# Altium PCB PCB_2.PcbDoc (part 2 of 2)
Units mm, origin at the board's own origin, x right, y up, seen from the top; angles counter-clockwise.
Board outline 100.25 x 100.26 mm, 2 copper layers (Top Layer, Bottom Layer); 108 components, 0 nets, 441 pads, 91 vias.
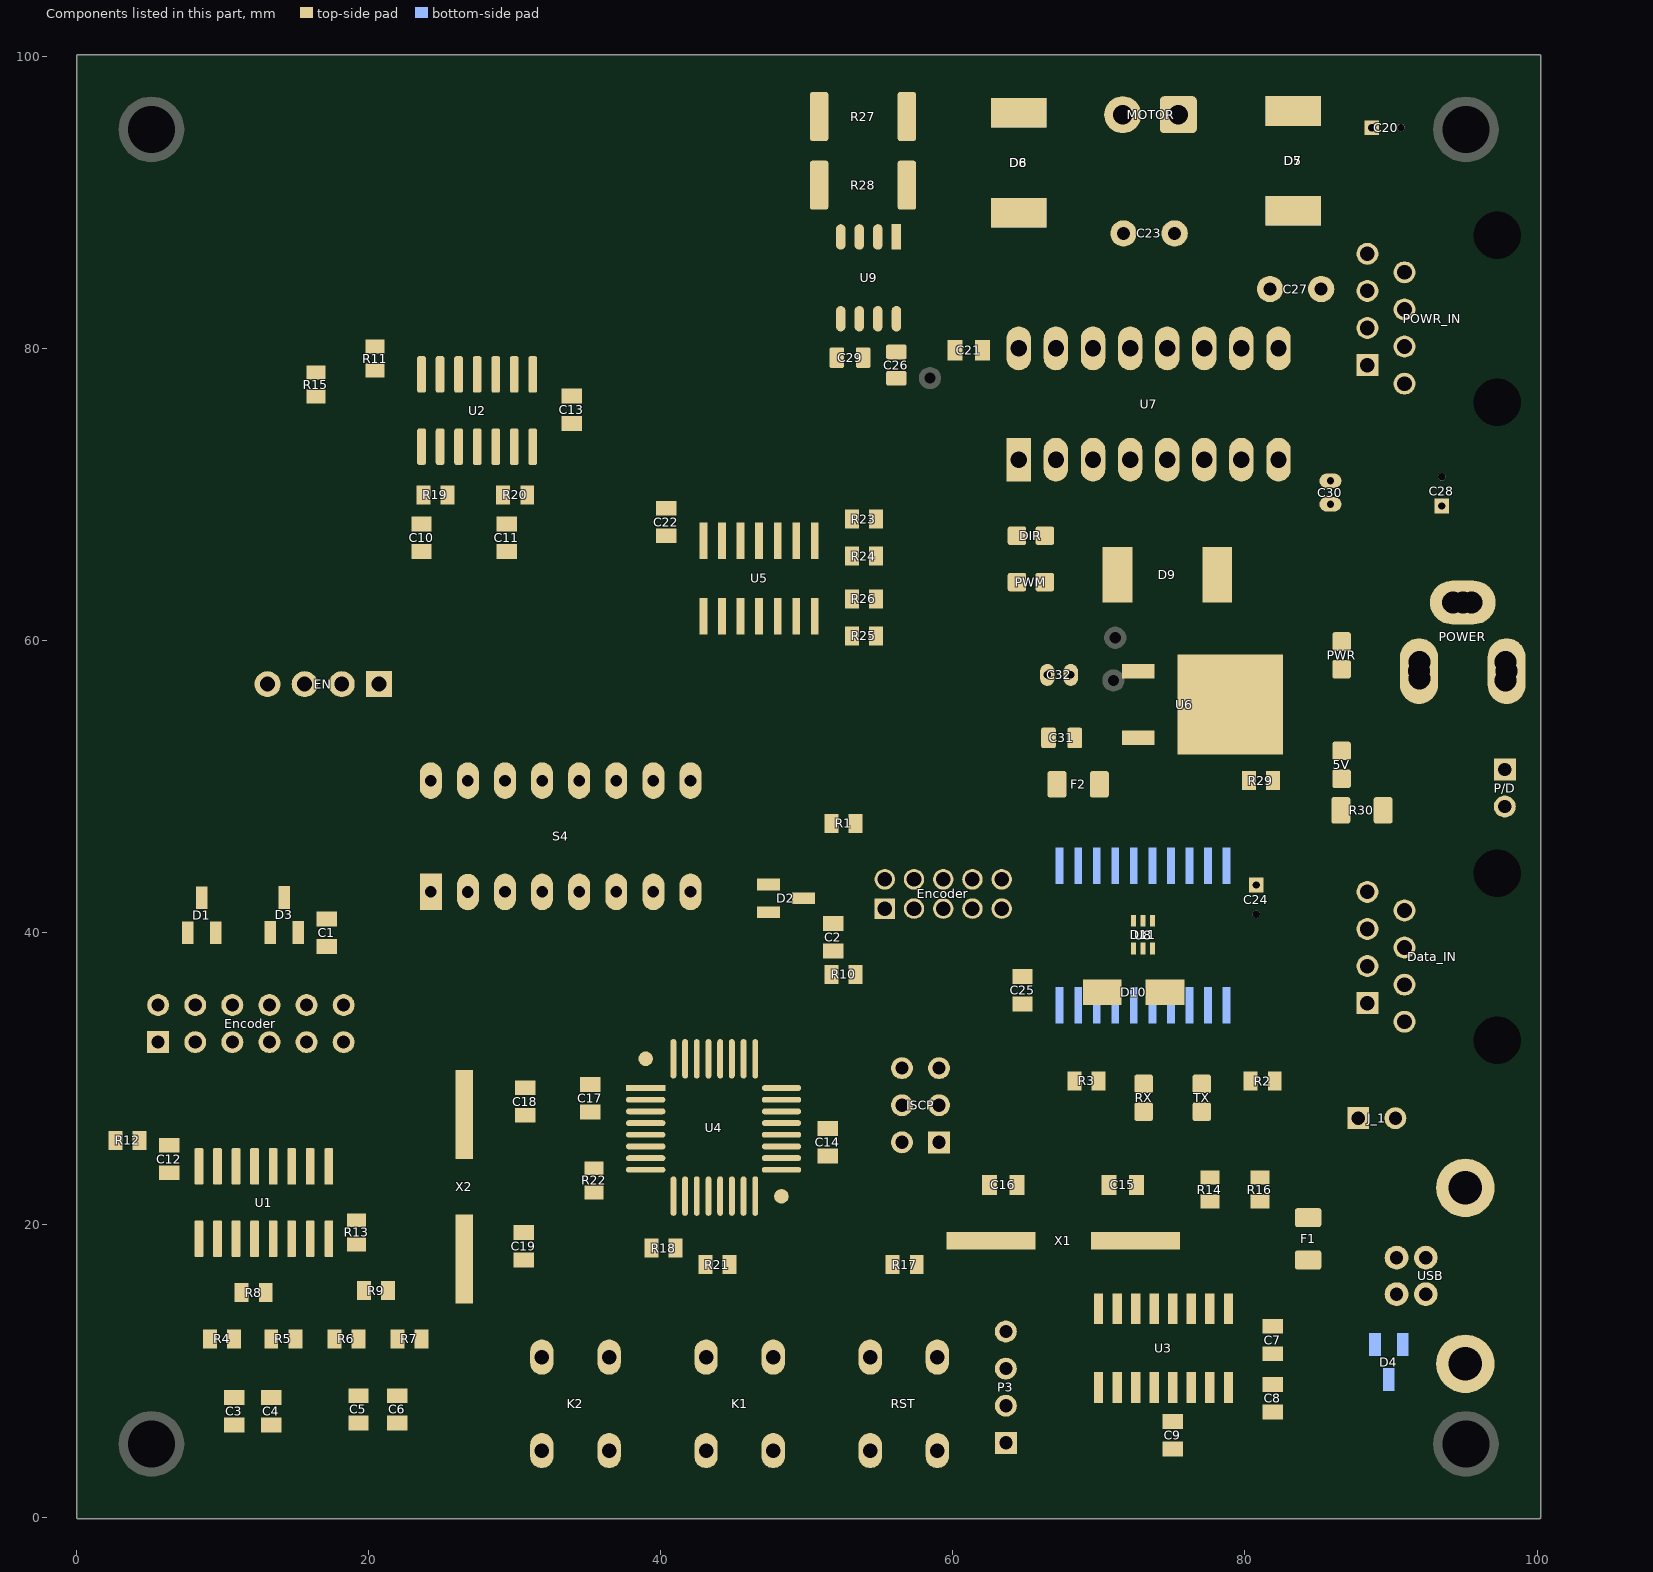
[diagram p2: the components of this part, seen from the top]

## Via types
v1: diameter 1.27, hole 0.711, Top Layer to Bottom Layer, 91 vias

## Nets (pads, with @x,y where several pads share a name; then routed paths per layer and width w, separated by ;. In a path a pad name is that pad's centre, name@x,y a point inside that pad or via, vN(x,y) a via of type N, cw(c..) or ccw(c..) an arc to the next point about the centre after c; other vN are vias at no path point) (continued)
copper on no net: | length 3549.7
  Top Layer w0.2: 72.3,40.64 72.375,40.715 72.375,40.828 ; 72.95,41.323 72.95,40.903 73,40.853 73.025,40.828 72.957,40.76 ; 86.36,36.449 90.922,36.449
  Top Layer w0.3: v1@68.58,38.748 68.766,38.933 68.766,39.356 70.984,41.575 ; v1(70.957,40.155) 71.143,40.341 72.001,40.341 72.3,40.64 ; 70.987,41.578 70.984,41.575 ; v1(72.375,33.293) 72.375,38.928 72.4,38.953 72.4,39.373 72.705,39.678 77.461,39.678 77.515,39.624 85.725,39.624 86.36,40.259 88.382,40.259 ; 72.544,42.591 72.59,42.545 73.65,41.485 73.65,40.853 73.675,40.828 ; 73,40.853 73,41.273 72.95,41.323 72.695,41.578 71.841,41.578 71.838,41.575 70.984,41.575 ; 73.025,38.928 73.025,37.973 73.406,37.592 74.549,37.592 74.714,37.757 75.291,37.757 v1(75.438,37.904) ; v1@75.438,37.943 79.798,37.943 80.283,38.428 84.381,38.428 86.36,36.449
  Top Layer w0.4: 2.667,25.781 2.667,25.606 3.44,24.833 3.44,22.297 3.674,22.063 12.475,22.063 13.462,23.05 13.462,24 ; v1(3.429,20.193) 3.683,20.193 4.953,21.463 20.447,21.463 21.717,20.193 ; v1(4.475,23.495) 4.513,23.533 6.312,23.533 6.35,23.571 ; 6.35,25.928 6.584,26.162 8.001,26.162 8.382,25.781 8.382,24 8.382,23.05 ; v1(7.62,16.002) 9.398,16.002 9.7,15.7 11.028,15.7 11.303,15.425 11.303,15.192 10.794,14.683 10.794,12.192 10.794,8.18 10.795,8.179 ; v1(9.633,28.956) 9.643,28.947 9.643,24.009 9.652,24 ; 10.795,6.299 13.335,6.299 13.399,6.363 19.241,6.363 19.304,6.426 21.971,6.426 ; 10.922,24 v1(10.922,26.924) ; 12.192,19.05 12.292,19.15 12.292,20.235 12.92,20.863 17.814,20.863 18.083,20.594 18.902,20.594 19.177,20.319 ; 12.192,24 12.192,24.95 15.436,28.194 17.053,28.194 20.193,31.334 20.193,45.72 22.479,48.006 27.424,48.006 29.337,49.919 29.337,50.419 ; 12.953,15.367 12.953,15.192 13.228,14.917 ; 13.335,8.179 13.336,8.18 13.336,12.192 13.336,14.809 13.228,14.917 ; v1(14.605,14.859) 14.547,14.917 13.228,14.917 ; 14.732,24 14.832,23.9 14.832,22.584 15.066,22.35 19.937,22.35 21.082,23.495 21.082,44.196 23.622,46.736 28.694,46.736 31.615,49.657 31.877,49.657 31.877,50.419 ; 14.986,12.192 14.986,12.367 16.002,13.383 v1(16.002,16.383) ; 15.621,57.023 15.621,69.469 20.193,74.041 20.193,74.295 15.494,74.295 14.263,75.526 14.263,78.779 15.62,80.136 20.447,80.136 ; 16.002,24 v1(16.002,26.543) ; 16.383,76.708 21.143,76.708 23.622,74.229 23.622,73.279 23.685,73.215 23.685,70.04 23.749,69.977 23.749,68.123 23.622,67.996 21.641,67.996 18.161,64.516 18.161,57.023 ; 17.272,19.05 17.272,18.769 17.372,18.669 19.177,18.669 20.193,18.669 21.717,20.193 ; 17.272,24 17.272,24.875 17.372,24.975 18.498,24.975 v1(18.923,25.4) ; 17.654,12.192 17.654,13.336 v1(18.034,13.716) ; v1(18.923,17.272) 18.923,17.037 19.411,16.549 19.411,15.594 19.686,15.319 19.304,14.937 19.304,12.192 19.304,8.306 ; 20.701,57.023 23.622,59.944 23.622,66.116 29.464,66.116 31.064,66.116 ; v1(21.399,18.098) 21.399,15.382 21.336,15.319 21.972,14.683 21.972,12.192 21.972,8.307 21.971,8.306 ; v1(22.479,32.131) 22.098,31.75 22.098,24.575 24.384,22.289 24.384,18.796 ; v1(22.987,16.129) 23.622,15.494 23.622,12.192 ; 23.622,78.229 23.622,78.386 23.622,81.026 24.638,82.042 32.004,82.042 33.909,80.137 33.909,76.759 37.033,76.759 40.386,73.406 40.386,69.063 41.885,69.063 v1(43.307,70.485) ; 24.257,50.419 24.257,53.467 25.019,54.229 v1(25.019,62.103) ; 24.892,73.279 24.892,70.659 25.399,70.152 25.399,69.977 v1(25.399,67.819) ; v1(25.273,75.565) 26.062,74.776 26.062,73.379 26.162,73.279 26.162,71.188 27.373,69.977 29.21,69.977 29.21,68.25 29.173,68.287 27.598,68.287 v1(27.432,68.453) ; 26.543,17.653 26.594,17.602 30.607,17.602 32.024,17.602 32.258,17.837 32.258,19.625 33.421,20.787 33.82,20.787 35.258,22.225 35.433,22.225 35.708,22.5 36.548,22.5 37.819,23.771 38.969,23.771 ; 26.543,27.559 26.594,27.508 30.734,27.508 30.924,27.508 32.8,25.633 32.8,25.442 34.367,23.875 35.433,23.875 35.608,23.875 36.304,24.571 38.969,24.571 ; v1(26.67,63.754) 26.797,63.627 26.797,50.419 ; 27.432,73.279 27.432,71.608 27.793,71.247 30.607,71.247 30.86,70.994 30.86,69.977 31.031,69.806 31.031,68.493 v1(31.197,68.327) ; v1(28.575,63.881) 38.227,63.881 47.371,54.737 47.371,43.307 47.751,43.307 48.351,43.907 51.646,43.907 52.246,43.307 v1(52.749,43.307) ; v1(28.956,60.833) 39.818,60.833 45.72,54.931 45.72,41.641 45.954,41.407 47.371,41.407 47.371,40.621 47.733,40.259 v1(49.149,40.259) ; 29.337,42.799 29.337,42.565 39.581,32.321 40.869,32.321 40.869,36.578 40.556,36.891 v1(40.556,37.127) ; v1(30.607,21.971) 30.607,19.482 29.211,19.482 26.95,21.742 26.899,21.742 24.638,24.003 24.638,31.115 25.146,31.623 28.308,31.623 30.543,29.388 30.734,29.388 32.08,29.388 33.731,27.737 35.179,27.737 35.23,27.686 37.403,27.686 37.488,27.771 37.819,27.771 38.969,27.771 41.063,27.771 41.411,27.423 ; 31.877,42.799 31.877,42.299 31.475,41.897 30.687,42.684 30.687,43.858 29.896,44.649 28.778,44.649 27.987,43.858 27.987,41.609 37.277,32.319 37.277,30.795 38.135,29.937 38.135,29.371 38.969,29.371 ; v1(34.036,32.893) 34.036,30.618 35.037,29.616 35.179,29.616 ; 34.417,50.419 34.417,49.919 30.599,46.101 24.511,46.101 22.352,43.942 22.352,37.338 23.368,36.322 32.071,36.322 36.477,31.915 36.477,29.464 37.37,28.571 38.969,28.571 ; v1(36.601,75.057) 36.424,74.879 33.909,74.879 31.892,74.879 31.242,74.229 31.242,73.279 31.242,72.329 32.432,71.139 32.432,67.484 31.064,66.116 ; v1(38.1,59.055) 38.1,53.086 38.107,53.079 38.107,49.683 39.497,48.293 39.497,42.799 ; 38.969,25.371 36.732,25.371 v1(35.814,26.289) 36.496,26.971 38.969,26.971 ; 38.969,26.171 41.177,26.171 41.411,26.405 41.411,27.423 ; 39.37,18.415 37.338,18.415 v1(35.814,19.939) 35.722,19.847 35.722,18.704 30.226,13.208 27.305,13.208 25.146,13.208 24.384,13.97 24.384,18.796 ; v1(40.132,58.42) 40.132,58.185 40.748,57.569 40.748,44.588 42.037,43.299 42.037,42.799 ; 41.02,18.415 41.02,18.59 41.669,19.239 41.669,21.971 ; v1(41.148,79.629) 51.805,79.629 52.059,79.375 ; 41.669,31.371 41.669,34.437 42.153,34.921 61.218,34.921 68.389,27.749 73.063,27.749 ; v1(41.783,57.404) 41.783,56.515 43.706,54.592 43.706,38.372 42.799,37.465 v1(42.799,36.068) ; 42.469,21.971 42.469,19.174 43.053,18.59 43.053,17.272 ; 42.469,31.371 42.469,33.837 42.953,34.321 60.548,34.321 68.453,26.416 v1(70.485,26.416) ; v1(42.896,29.18) 42.896,28.986 43.707,28.175 45.563,28.175 45.959,28.571 48.269,28.571 ; 42.926,61.671 42.926,60.688 45.194,58.42 v1(45.847,58.42) ; 42.926,66.853 42.926,65.131 42.692,64.897 41.656,64.897 40.386,66.167 40.386,67.183 40.195,67.183 39.129,66.116 31.064,66.116 ; 43.269,31.371 43.269,33.237 43.753,33.721 58.821,33.721 59.055,33.487 59.055,30.734 ; 44.069,31.371 44.069,32.521 44.269,32.721 44.269,32.77 44.62,33.121 46.718,33.121 50.248,29.591 v1(51.435,29.591) ; 44.196,61.671 44.196,66.853 ; v1(44.577,26.035) 44.713,26.171 48.269,26.171 ; 44.703,17.272 47.516,14.459 50.467,14.459 51.435,15.427 51.435,24.714 ; v1(44.831,29.21) 44.869,29.248 44.869,31.371 ; v1(45.339,82.169) 45.466,82.296 49.149,82.296 50.419,83.566 54.61,83.566 54.864,83.312 54.864,82.042 ; 45.669,21.971 45.869,21.771 45.869,20.572 48.514,17.927 v1(48.514,17.145) ; v1(45.72,72.39) 45.72,72.155 45.466,71.901 45.466,66.853 45.466,64.897 45.847,64.516 47.879,64.516 48.006,64.643 48.006,66.853 ; 46.469,21.971 46.469,20.821 50.038,17.252 v1(50.038,15.494) ; 46.736,66.853 46.736,69.79 49.336,72.39 54.382,72.39 56.541,70.231 65.559,70.231 67.056,71.728 67.056,72.39 ; 48.269,23.771 49.419,23.771 49.911,23.279 v1(49.911,20.828) ; 48.269,24.571 49.993,24.571 50.137,24.714 51.435,24.714 ; 49.276,66.853 v1(49.276,70.866) ; v1(49.53,64.516) 49.53,64.687 50.629,65.786 ; v1@49.943,45.751 49.943,58.325 ; 51.689,38.633 51.816,38.76 ; v1(52.324,70.755) 52.324,70.532 53.086,69.77 53.086,68.326 53.086,68.501 53.961,69.376 55.377,69.376 56.427,68.326 65.151,68.326 66.294,67.183 ; 52.324,82.042 52.276,81.994 52.276,80.851 52.07,80.645 52.07,79.386 52.059,79.375 ; 52.324,87.642 53.594,87.642 ; 53.086,65.786 50.629,65.786 ; v1@53.562,24.225 52.578,23.241 52.578,17.907 53.213,17.272 55.88,17.272 ; 53.594,82.042 53.642,81.994 53.642,80.851 53.975,80.518 53.975,79.491 53.859,79.375 ; 54.736,60.325 54.863,60.198 60.579,60.198 64.389,64.008 ; 54.736,62.865 60.071,62.865 64.389,67.183 ; 56.134,77.967 52.293,77.967 52.059,78.201 52.059,79.375 ; 56.134,79.767 56.134,82.03 ; 56.134,82.042 56.134,82.03 ; 56.515,25.654 54.991,25.654 54.038,24.701 54.026,24.714 51.435,24.714 ; 56.515,30.734 52.499,26.718 51.559,26.718 51.435,26.594 51.244,26.594 50.867,26.971 48.269,26.971 45.388,26.971 44.936,27.423 41.411,27.423 ; 57.279,43.718 57.341,43.656 ; v1(58.674,37.297) 58.814,37.297 59.617,38.1 61.595,38.1 68.164,44.669 73.727,44.669 74.041,44.983 v1(74.041,47.371) ; 58.674,81.788 58.547,81.915 56.249,81.915 56.134,82.03 ; 58.942,10.947 58.942,9.003 61.341,6.604 61.341,3.704 61.616,3.429 73.647,3.429 74.867,4.648 75.057,4.648 ; 62.509,19.025 62.509,17.379 62.744,17.145 64.598,17.145 67.491,14.252 69.977,14.252 ; 63.627,5.08 71.247,5.08 72.399,6.232 72.399,8.745 72.517,8.862 ; 63.627,7.62 63.417,7.83 62.401,7.83 61.849,8.382 61.849,13.843 62.103,14.097 64.262,14.097 66.929,11.43 73.152,11.43 73.787,10.795 73.787,8.862 ; 63.627,10.16 67.31,6.477 70.485,6.477 71.22,7.212 71.22,8.835 71.247,8.862 ; 63.627,12.7 67.465,8.862 69.977,8.862 ; v1(64.135,50.292) 66.929,47.498 v1(69.342,47.498) ; 64.77,35.128 64.96,35.128 64.968,35.136 68.58,38.748 v1(68.58,38.862) ; 66.294,64.008 66.294,65.243 67.652,66.601 67.652,67.567 66.132,69.088 56.836,69.088 54.134,71.79 50.78,71.79 50.546,71.556 50.546,66.853 50.546,65.869 50.629,65.786 ; v1@66.421,38.468 v1(66.421,38.481) 66.421,41.021 69.469,44.069 77.978,44.069 80.772,41.275 83.246,41.275 87.978,46.007 ; v1(67.691,24.638) 66.294,24.638 64.888,23.232 64.697,23.232 64.389,22.924 64.389,22.733 70.688,22.733 ; v1(69.85,42.591) 72.544,42.591 ; 69.976,29.855 70.177,29.654 73.063,29.654 ; 70.03,50.165 70.538,50.673 v1(72.517,50.673) ; 71.247,14.252 71.247,15.748 70.758,16.237 70.758,18.523 71.158,18.923 72.517,18.923 ; v1(71.993,16.748) 71.993,16.526 72.517,16.002 72.517,14.252 ; 72.59,42.545 73.787,42.545 75.946,40.386 83.206,40.386 85.619,42.799 88.382,42.799 ; 73.787,14.252 v1(73.787,15.875) ; 75.057,6.528 75.057,8.862 75.082,8.837 ; 75.057,14.252 75.057,12.319 75.819,11.557 80.226,11.557 81.724,13.056 81.915,13.056 ; 76.327,14.252 76.327,18.161 77.597,19.431 77.597,21.591 ; 77.042,29.654 80.2,29.654 80.391,29.845 ; 77.597,14.252 77.597,16.383 81.026,19.812 81.026,21.591 ; 78.359,54.991 78.994,55.626 ; 78.867,8.13 78.985,8.012 79.789,8.012 80.612,7.188 81.915,7.188 ; 78.867,14.252 78.867,15.514 79.101,15.748 82.296,15.748 84.709,13.335 84.709,8.382 ; v1(81.661,34.163) 83.058,34.163 84.963,32.258 89.271,32.258 90.922,33.909 ; 86.614,52.451 87.284,51.781 87.405,51.781 87.978,51.208 87.978,46.007 ; v1(86.995,13.208) v1(91.817,13.208) ; 90.299,17.68 90.379,17.76 ; 90.922,41.529 90.922,43.063 87.978,46.007 ; 21.717,20.193 22.987,20.193 24.384,18.796
  Top Layer w0.444: v1(33.655,19.558) 35.093,20.996 35.926,20.996 36.901,21.971 40.869,21.971
  Top Layer w0.8: v1(6.477,14.224) 6.477,13.208 7.493,12.192 9.069,12.192 9.144,12.192 ; 16.002,78.486 23.522,78.486 23.622,78.386 ; 21.971,6.426 22.162,6.426 24.041,4.547 31.863,4.547 36.463,4.547 43.102,4.547 47.703,4.547 54.342,4.547 58.942,4.547 ; 27.305,13.208 27.305,9.525 28.829,8.001 49.95,8.001 50.419,8.47 50.419,11.636 55.88,17.097 55.88,17.272 ; 31.863,10.947 36.463,10.947 36.463,11.347 41.02,15.904 41.02,18.415 ; 43.053,17.272 43.078,17.247 43.078,10.972 43.102,10.947 47.703,10.947 ; v1(43.307,70.485) 43.307,73.914 45.085,75.692 63.246,75.692 64.453,76.898 64.453,79.947 62.09,79.947 62.09,80.01 60.402,81.698 58.764,81.698 58.674,81.788 ; 50.546,61.671 50.679,61.805 50.679,63.76 51.244,64.325 54.267,64.325 54.661,64.719 54.661,65.711 54.736,65.786 54.736,68.151 ; 51.689,37.16 51.764,37.085 51.764,36.283 52.233,35.814 62.484,35.814 ; 53.086,60.325 53.086,62.865 ; 53.339,47.497 53.35,47.486 53.35,45.647 55.341,43.656 ; v1(53.34,24.447) v1@53.34,24.638 ; 54.342,10.947 58.942,10.947 58.942,13.829 57.53,15.241 57.53,17.272 57.53,20.065 60.706,23.241 60.706,29.083 59.055,30.734 ; 54.736,68.326 54.736,68.151 ; 56.134,77.967 56.145,77.978 58.433,77.978 60.147,79.692 60.147,79.883 ; v1(57.531,67.056) 57.441,67.146 55.741,67.146 54.736,68.151 ; 62.484,35.91 62.484,36.322 63.246,37.084 64.592,37.084 64.719,36.957 64.77,37.008 ; 62.509,19.025 62.509,22.733 ; 72.517,18.923 72.568,18.974 72.568,22.733 ; 73.063,27.749 73.298,27.515 73.298,27.365 77.422,23.241 77.597,23.241 ; 77.042,27.749 79.026,25.765 79.026,25.066 80.851,23.241 81.026,23.241 ; v1(78.867,6.096) 78.867,8.13 78.867,8.862 ; 81.915,9.068 81.915,11.176 82.105,11.176 82.213,11.068 82.213,10.878 84.709,8.382 84.709,1.905 ; 82.423,18.161 82.423,17.145 85.725,13.843 85.725,7.747 87.249,6.223 v1(87.757,6.223)
  Top Layer w1: 4.318,25.78 4.318,26.797 5.588,28.067 5.588,32.512 ; 4.319,25.654 4.514,25.459 6.342,25.459 6.35,25.451 ; 7.625,40.005 7.625,35.69 8.128,35.187 8.128,35.052 8.128,32.512 ; 9.525,40.005 9.525,36.33 10.668,35.187 10.668,35.052 10.668,32.512 ; 10.795,6.299 10.787,6.307 9.187,6.307 ; 13.081,57.023 13.081,51.054 18.544,45.591 18.544,40.147 18.133,39.737 18.007,39.737 17.335,39.065 17.145,39.065 17.145,36.33 18.288,35.187 18.288,35.052 18.288,32.512 ; 13.208,32.512 13.208,35.052 13.241,35.085 13.241,39.985 13.274,40.018 ; 15.174,40.018 15.174,35.761 15.748,35.187 15.748,35.052 15.748,32.512 ; 17.145,40.945 16.954,40.945 16.637,41.262 16.637,41.529 15.748,42.418 14.224,42.418 ; 24.041,4.547 23.939,4.445 ; 30.734,29.388 v1(30.734,32.131) ; 31.863,4.547 31.761,4.445 23.939,4.445 ; v1@47.117,39.308 47.169,39.36 47.242,39.36 47.841,38.76 51.816,38.76 ; 49.771,42.357 49.951,42.357 51.618,40.69 51.618,40.648 51.625,40.64 51.816,40.64 52.006,40.64 52.014,40.648 52.014,40.838 52.832,41.656 55.341,41.656 ; 50.673,61.544 50.673,59.055 49.943,58.325 49.911,58.293 v1(49.911,45.212) 49.963,45.264 49.963,45.646 51.689,47.372 51.689,47.497 ; 50.848,96.901 50.848,95.885 ; 51.689,37.16 51.689,38.633 ; 52.324,87.642 51.804,87.642 50.848,88.598 50.848,91.184 ; 53.086,60.325 53.086,58.547 53.975,57.658 66.472,57.658 ; 53.339,37.16 54.686,37.16 57.264,39.738 57.264,41.579 57.341,41.656 ; 54.864,87.642 56.134,87.642 56.848,88.356 56.848,91.186 ; 56.848,96.901 56.848,95.887 ; 58.942,4.547 58.942,4.147 61.184,1.905 84.709,1.905 86.503,1.905 95.088,10.49 ; 59.341,43.656 59.341,49.308 63.373,53.34 66.548,53.34 66.548,57.332 66.472,57.408 66.472,57.658 ; 62.484,35.91 62.484,35.814 62.484,35.218 65.534,32.168 66.139,32.168 68.326,29.98 ; 64.77,35.128 64.778,35.136 64.968,35.136 66.618,35.136 67.4,35.918 70.225,35.918 ; 67.056,72.39 67.056,80.01 ; 67.13,50.165 67.13,50.415 68.348,51.633 68.348,53.34 68.348,53.346 ; 68.072,57.658 68.072,57.408 68.348,57.132 68.348,53.346 ; 68.326,29.855 68.326,29.98 ; 68.326,30.03 68.326,29.98 ; 68.326,30.626 68.912,31.212 81.46,31.212 82.016,30.656 82.016,29.87 82.041,29.845 82.041,29.72 ; 69.528,80.078 69.596,80.01 69.596,72.39 ; 70.993,57.277 71.093,57.377 71.565,57.377 72.094,57.906 72.694,57.906 72.694,59.485 73.28,60.071 86.487,60.071 86.614,59.944 88.9,59.944 90.297,58.547 91.948,58.547 ; 71.12,60.198 71.22,60.098 72.667,60.098 72.694,60.071 ; 71.28,65.059 71.278,65.061 71.247,65.024 71.247,68.58 72.136,69.469 72.136,72.39 ; 71.628,96.012 71.398,95.782 71.41,95.782 71.891,95.301 ; 71.898,63.492 69.588,63.492 66.472,60.376 66.472,57.658 ; 72.265,72.261 72.136,72.39 ; 72.694,53.346 68.348,53.346 ; 74.525,35.918 80.622,35.918 81.28,36.576 84.201,36.576 85.598,35.179 88.382,35.179 ; 75.262,69.088 74.676,69.674 74.676,72.39 ; 77.216,72.39 77.216,80.01 77.284,80.078 ; 78.105,64.516 78.367,64.516 ; 78.621,64.262 78.367,64.516 ; 78.994,55.626 79.397,55.223 79.397,51.287 80.115,50.569 80.24,50.569 80.24,50.444 80.265,50.419 ; 79.756,72.39 79.756,80.01 ; 80.29,50.394 80.29,49.646 81.549,48.387 ; 80.772,43.275 80.772,47.61 81.549,48.387 ; 81.915,50.419 81.915,50.457 81.94,50.482 86.55,50.482 86.614,50.546 ; 82.296,72.39 82.423,72.263 ; 82.423,18.161 82.423,23.959 82.041,24.341 82.041,29.72 ; 84.328,17.6 84.408,17.68 90.299,17.68 ; 84.328,20.5 84.578,20.5 90.201,26.123 90.201,27.209 90.297,27.305 ; 86.561,48.387 81.549,48.387 ; 86.614,58.039 89.228,55.425 89.228,51.308 89.461,51.075 89.461,48.387 ; 90.922,41.529 91.018,41.433 92.552,41.433 93.599,40.386 93.599,31.623 91.186,29.21 89.662,29.21 87.757,27.305 84.456,27.305 82.041,29.72 ; 90.922,82.677 90.826,82.773 ; 90.922,84.836 90.826,84.932 ; 97.917,57.912 97.917,58.928 94.234,62.611 95.25,62.611 93.345,64.516 78.367,64.516 ; 5.588,32.512 5.588,35.052 5.588,41.402 6.591,42.405 8.575,42.405 ; 5.588,32.512 1.27,28.194 1.27,14.224 9.187,6.307 ; 8.575,42.405 8.582,42.411 14.217,42.411 14.224,42.418 ; 8.575,42.405 8.575,44.88 9.161,45.466 13.638,45.466 14.224,44.88 14.224,42.418 ; 9.187,6.307 11.049,4.445 23.939,4.445 ; 50.848,91.184 50.973,91.059 v1(52.197,91.059) 52.197,91.132 52.324,91.259 v1(52.324,92.761) v1(52.324,94.31) v1(52.324,95.885) 50.848,95.885 ; 50.848,91.184 50.848,91.186 50.848,95.885 ; 56.848,91.186 56.848,95.885 56.848,95.887 ; 56.848,91.186 v1(55.245,91.186) v1(55.245,96.012) 56.723,96.012 56.848,95.887 ; 72.136,72.39 74.676,72.39 ; 72.136,72.39 72.136,80.01 74.676,80.01 74.676,72.39 ; 90.826,82.773 90.826,84.932 ; 90.826,82.773 89.692,82.773 88.517,83.947 88.382,83.947 88.382,86.487 88.453,86.487 90.009,84.932 90.826,84.932 ; 88.382,78.867 88.382,81.407 88.517,81.407 89.692,80.233 90.826,80.233 90.922,80.137 90.922,77.597 89.652,77.597 88.382,78.867
  Bottom Layer w0.2: 68.58,34.069 68.58,35.052 v1(68.58,38.862) ; v1(69.85,42.591) 69.85,44.602 ; v1(72.375,33.293) 72.382,33.3 72.382,35.044 72.39,35.052
  Bottom Layer w0.3: 73.66,35.052 73.66,36.703 75.045,38.088 75.228,37.904 v1(75.438,37.904)
  Bottom Layer w0.4: v1(3.429,20.193) 4.318,21.082 4.318,23.338 v1(4.475,23.495) ; v1(7.62,16.002) 7.62,26.924 9.633,28.937 v1(9.633,28.956) ; 10.668,32.512 10.668,29.823 12.608,27.883 12.608,19.65 15.875,16.383 v1(16.002,16.383) ; v1(10.922,26.924) 10.922,18.542 v1(14.605,14.859) ; 13.208,32.512 13.208,26.797 14.986,25.019 14.986,19.431 18.034,16.383 v1(18.034,13.716) ; 15.748,32.512 22.987,25.273 v1(22.987,16.129) ; v1(16.002,26.543) 19.244,26.543 21.399,24.387 v1(21.399,18.098) ; 18.161,57.023 21.971,60.833 v1(28.956,60.833) ; 18.288,32.512 21.863,32.512 ; v1(18.923,17.272) v1(18.923,25.4) ; v1(20.447,74.295) 21.717,75.565 v1(25.273,75.565) ; v1(25.019,62.103) 29.083,62.103 31.197,64.217 v1(31.197,68.327) ; v1(25.399,67.819) 26.67,66.548 v1(26.67,63.754) ; v1(27.432,68.453) 27.432,65.024 v1(28.575,63.881) ; v1(30.607,21.971) 30.607,13.081 29.337,11.811 29.337,7.473 31.863,4.947 31.863,4.547 ; 31.877,42.799 31.877,45.847 34.799,48.769 34.893,48.769 35.567,49.443 35.567,49.537 35.687,49.657 35.687,51.963 35.921,52.197 58.547,52.197 60.452,50.292 v1(64.135,50.292) ; v1(34.036,32.893) 34.036,31.115 39.116,26.035 v1(44.577,26.035) ; 34.417,42.799 34.417,43.299 35.949,44.831 37.965,44.831 39.497,43.299 39.497,42.799 ; v1(35.814,19.939) v1(35.814,26.289) ; v1(36.601,75.057) 41.148,79.604 v1(41.148,79.629) ; v1(38.1,59.055) 38.1,68.58 41.91,72.39 v1(45.72,72.39) ; v1(40.132,58.42) 40.386,58.674 40.386,64.282 40.62,64.516 v1(49.53,64.516) ; v1(40.556,37.127) 40.726,37.297 v1(58.674,37.297) ; v1(41.783,57.404) 41.764,57.385 38.306,57.385 37.065,58.626 37.065,71.609 38.989,73.533 43.434,73.533 45.339,75.438 v1(45.339,82.169) ; 42.037,50.419 47.981,50.419 48.889,51.327 57.523,51.327 64.441,44.409 64.441,35.255 66.294,33.402 69.183,33.402 69.85,34.069 69.85,35.052 ; v1(42.799,36.068) 42.799,29.277 v1(42.896,29.18) ; v1(44.831,29.21) 49.53,29.21 54.356,34.036 62.738,34.036 64.616,32.158 79.656,32.158 v1(81.661,34.163) ; v1@45.752,72.422 51.022,72.422 52.324,71.12 v1(52.324,70.755) ; v1(45.847,58.42) 52.959,58.42 63.5,68.961 76.989,68.961 79.756,71.728 79.756,72.39 ; v1(48.514,17.145) 48.67,17.301 49.305,17.301 54.737,22.733 54.737,26.416 56.515,28.194 ; v1(49.149,40.259) 58.991,40.259 59.341,40.609 59.341,41.656 ; v1(49.276,70.866) 50.422,69.72 54.787,69.72 57.457,72.39 64.516,72.39 64.516,73.052 66.14,74.676 80.983,74.676 82.296,75.989 82.296,80.01 ; v1(49.911,20.828) 47.117,18.034 47.117,15.113 48.641,13.589 52.832,13.589 60.205,20.962 60.205,27.044 59.055,28.194 ; v1(50.038,15.494) 51.089,16.545 52.994,16.545 58.505,22.056 58.505,25.104 59.055,25.654 ; v1(51.435,29.591) 55.28,33.436 61.687,33.436 63.565,31.558 81.088,31.558 87.039,37.509 88.172,37.509 88.382,37.719 ; v1(52.749,43.307) 53.086,43.307 54.535,44.756 56.241,44.756 57.341,43.656 ; 67.31,35.052 67.31,36.035 66.421,36.924 v1(66.421,38.481) 66.421,48.133 68.961,50.673 v1(72.517,50.673) ; v1(67.691,24.638) 92.98,24.638 95.088,22.53 ; v1(68.58,38.862) 67.31,40.132 67.31,44.602 67.31,47.879 68.453,49.022 76.316,49.022 80.772,44.566 80.772,43.275 79.445,44.602 78.74,44.602 ; 68.58,44.602 68.58,41.275 69.837,41.275 v1(70.957,40.155) ; v1(69.342,47.498) 70.024,47.498 71.12,46.402 71.12,44.602 ; v1(70.485,26.416) v1(78.486,26.416) ; v1(71.993,16.748) 73.025,17.78 87.859,17.78 90.379,15.26 ; 72.39,44.602 72.39,46.99 72.771,47.371 v1(74.041,47.371) ; v1(73.787,15.875) 83.947,15.875 86.614,13.208 v1(86.995,13.208) ; 92.379,15.26 92.379,15.537
  Bottom Layer w0.444: v1(33.655,19.558) 33.655,22.606 32.639,23.622 32.639,41.148 33.147,41.656 33.147,46.109 36.957,49.919 36.957,50.419 ; 36.957,42.799 36.957,42.164 37.092,42.164 38.362,40.894 40.632,40.894 42.037,42.299 42.037,42.799 ; 39.497,50.419 39.497,49.919 44.831,44.585 44.831,38.614 45.091,38.354 59.817,38.354 65.391,32.78 69.831,32.78 71.12,34.069 71.12,35.052
  Bottom Layer w0.5: v1(70.957,40.155) 70.71,39.907 71.628,38.989 90.922,38.989
  Bottom Layer w0.8: v1(6.477,14.224) 5.842,14.859 5.842,28.448 8.128,30.734 8.128,32.512 ; v1(43.307,70.485) 45.021,68.77 55.816,68.77 v1(57.531,67.056) ; v1(53.34,24.447) 53.086,24.701 53.086,29.337 56.261,32.512 60.452,32.512 62.611,30.353 62.611,22.352 v1(78.867,6.096) 78.994,6.223 v1(87.757,6.223) ; 72.136,79.348 72.136,80.01 ; 88.9,11.811 88.9,13.781 90.379,15.26 ; 90.8,11.811 90.8,12.191 92.379,13.77 92.379,15.26
  Bottom Layer w1: v1(11.303,45.593) 11.303,46.99 15.113,50.8 19.939,50.8 ; v1(30.734,32.131) 30.734,33.147 29.972,33.909 27.559,33.909 19.939,41.529 19.939,50.8 ; v1(47.117,39.411) 47.117,43.967 48.31,45.16 49.859,45.16 v1(49.911,45.212) ; 50.419,97.282 53.34,97.282 53.475,97.417 53.475,98.474 54.061,99.06 86.614,99.06 88.678,96.996 88.678,95.123 ; 55.341,41.656 51.894,41.656 51.308,42.242 51.308,45.07 51.894,45.656 58.692,45.656 59.341,45.007 59.341,43.656 ; 66.472,57.658 66.472,56.464 66.929,56.007 ; 69.596,80.01 69.596,83.725 ; 71.628,96.012 71.765,95.875 ; 75.311,95.885 75.438,96.012 ; v1(76.962,53.213) 76.91,53.265 76.719,53.265 76.695,53.289 69.647,53.289 66.929,56.007 ; 88.382,42.799 93.345,47.762 93.345,50.595 93.931,51.181 97.79,51.181 ; 88.382,86.106 88.382,86.622 ; 88.382,86.487 90.932,89.037 90.932,94.869 90.678,95.123 ; 89.85,9.411 93.198,9.411 94.277,10.49 95.088,10.49 95.663,11.064 95.663,13.272 96.608,14.217 96.608,16.217 96.708,16.317 96.888,16.317 96.888,19.919 95.088,21.718 95.088,22.53 94.514,21.956 94.514,19.896 92.379,17.76 ; 90.922,38.989 93.853,41.92 93.853,44.704 97.79,48.641 ; 19.939,50.8 25.146,56.007 66.929,56.007
  other v1: 81.534,53.213 76.962,54.991 81.534,54.991 55.245,92.761 55.245,94.31

## Other copper
Top Layer:
  rectangle: 70.866,69.723 75.946,82.804
  rectangle: 70.866,62.484 73.914,74.168
  rectangle: 77.089,60.96 97.79,65.532
  rectangle: 95.123,54.737 99.568,65.532
  rectangle: 87.503,65.151 91.694,81.28
  rectangle: 73.533,67.691 86.868,70.104
  rectangle: 61.976,93.345 73.152,98.044
  rectangle: 73.914,93.345 85.471,98.044
  rectangle: 57.023,87.757 59.817,97.917
  rectangle: 59.69,87.757 67.183,91.567
  rectangle: 61.468,83.82 67.183,91.44
  rectangle: 61.468,83.82 80.137,86.36
  rectangle: 77.089,85.471 85.725,90.805
  rectangle: 70.231,86.614 73.152,98.044
  rectangle: 73.914,86.614 76.708,98.044
  rectangle: 70.866,82.042 83.82,83.185
  rectangle: 80.391,82.042 83.82,85.217
Bottom Layer:
  rectangle: 49.403,73.152 53.975,97.917
  rectangle: 53.721,73.152 62.865,79.502
  rectangle: 70.866,75.184 75.819,82.804
  rectangle: 62.103,75.184 71.501,78.105
  rectangle: 54.229,86.487 58.166,97.917
  rectangle: 82.804,55.372 93.726,60.579
  rectangle: 69.977,56.261 83.185,61.214
  rectangle: 81.153,70.612 87.122,74.168
  rectangle: 84.455,83.058 92.456,88.011
  rectangle: 84.455,70.612 87.122,88.011
  rectangle: 81.661,85.598 85.217,88.9
  rectangle: 86.995,70.612 96.012,73.533
  rectangle: 92.202,72.771 94.996,88.011
  rectangle: 87.503,65.024 97.917,67.437
  rectangle: 95.123,65.024 98.552,73.533
  rectangle: 87.503,58.42 92.075,67.056
  rectangle: 84.709,67.691 94.488,70.104
  rectangle: 75.311,52.197 82.55,56.007
  rectangle: 61.976,93.345 73.152,98.044
  rectangle: 73.914,93.345 85.471,98.044
  rectangle: 61.849,89.408 85.852,92.964
  rectangle: 68.58,78.613 70.612,88.773
  rectangle: 76.2,78.486 78.232,88.646
  rectangle: 68.58,85.471 73.025,89.027
  rectangle: 73.787,85.471 78.232,89.027

## Silkscreen, mask and mechanical layers (free items; w line width, h text height)
Top Overlay:
  lines w0.254: 0.889,60.071 51.435,60.071 ; 10.287,84.201 33.147,84.201 ; 10.414,92.202 33.02,92.202 ; 10.414,96.266 33.02,96.266 ; 60.579,89.408 60.579,97.917 ; 60.706,60.071 60.706,76.2 ; 60.706,81.153 60.706,82.804
  text "ACRRL" at 10.56,97.047 h1.5
  text "Dr.Asemani" at 10.487,94.688 h1
  text "Shiraz University" at 10.487,92.989 h1
  text "Designer:" at 10.36,90.576 h1
  text "Mohammad Sabouri" at 10.36,88.592 h1
  text "09360226014" at 10.36,86.814 h1
  text "Mohamadsabory@yahoo.com" at 10.36,84.988 h1
  text "B" at 15.313,53.667 h1.5
  text "A" at 17.599,53.54 h1.5
  text "Gnd" at 21.263,52.651 h1 r90
  text "+5V" at 13.135,52.397 h1 r90
  text "B" at 56.969,45.539 h1.5
  text "Gnd" at 59.744,45.158 h1 r90
  text "A" at 58.874,38.554 h1.5
  text "+5V" at 57.966,37.538 h1 r90
  text "Gnd" at 3.483,32.331 h1 r90
  text "B+" at 8.817,27.886 h1.5 r90
  text "B-" at 11.357,27.886 h1.5 r90
  text "A+" at 13.897,27.886 h1.5 r90
  text "A-" at 16.437,27.886 h1.5 r90
Bottom Overlay:
  lines w0.254: 10.287,84.201 33.147,84.201 ; 10.414,92.202 33.02,92.202 ; 10.414,96.266 33.02,96.266
  text "ACRRL" at 32.874,97.047 h1.5
  text "Dr.Asemani" at 32.947,94.688 h1
  text "Shiraz University" at 32.947,92.989 h1
  text "Designer:" at 33.074,90.576 h1
  text "Mohammad Sabouri" at 33.074,88.592 h1
  text "09360226014" at 33.074,86.814 h1
  text "Mohamadsabory@yahoo.com" at 33.074,84.988 h1
Mechanical 1:
  lines w0.254: 0.127,100 0.127,0 100.127,0 ; 0.127,100.005 100.127,100.005 100.127,0.005

## Text inside footprints (layer, text, board x,y; h text height)
D1: Mechanical 15 "Q3" at 8.175,41.455 h0.5 r180
D2: Mechanical 15 "Q3" at 48.821,41.957 h0.5 r90
D3: Mechanical 15 "Q3" at 13.824,41.468 h0.5 r180
D4: Mechanical 15 "Q3" at 89.434,10.195 h0.5
Encoder: Top Overlay "+5v" at 20.193,35.56 h1.27 r270
ISCP: Top Overlay "1" at 59.563,23.622 h1.27 r90; Top Overlay "2" at 57.023,23.114 h1.27 r90; Top Overlay "5" at 59.563,32.258 h1.27 r90; Top Overlay "6" at 57.023,32.258 h1.27 r90
S4: Top Overlay "8" at 41.783,44.094 h0.76; Top Overlay "7" at 39.222,44.094 h0.76; Top Overlay "6" at 36.662,44.094 h0.76; Top Overlay "5" at 34.101,44.094 h0.76; Top Overlay "4" at 31.541,44.094 h0.76; Top Overlay "3" at 28.98,44.094 h0.76; Top Overlay "2" at 26.42,44.094 h0.76; Top Overlay "1" at 24.156,44.094 h0.76; Top Overlay "ON" at 32.487,48.449 h0.7